# Altium PCB Tigershark 3D R1.8.PcbDoc (part 3 of 3)
Units mil, origin at the board's own origin, x right, y up, seen from the top; angles counter-clockwise.
Board outline 4755 x 4000 mil, 4 copper layers (Top Layer, Groun Plane, Power Plane, Bottom Layer), stack 61.73 mil thick; 343 components, 234 nets, 1061 pads, 540 vias.
Unrouted connection lines stored in the file: 312.
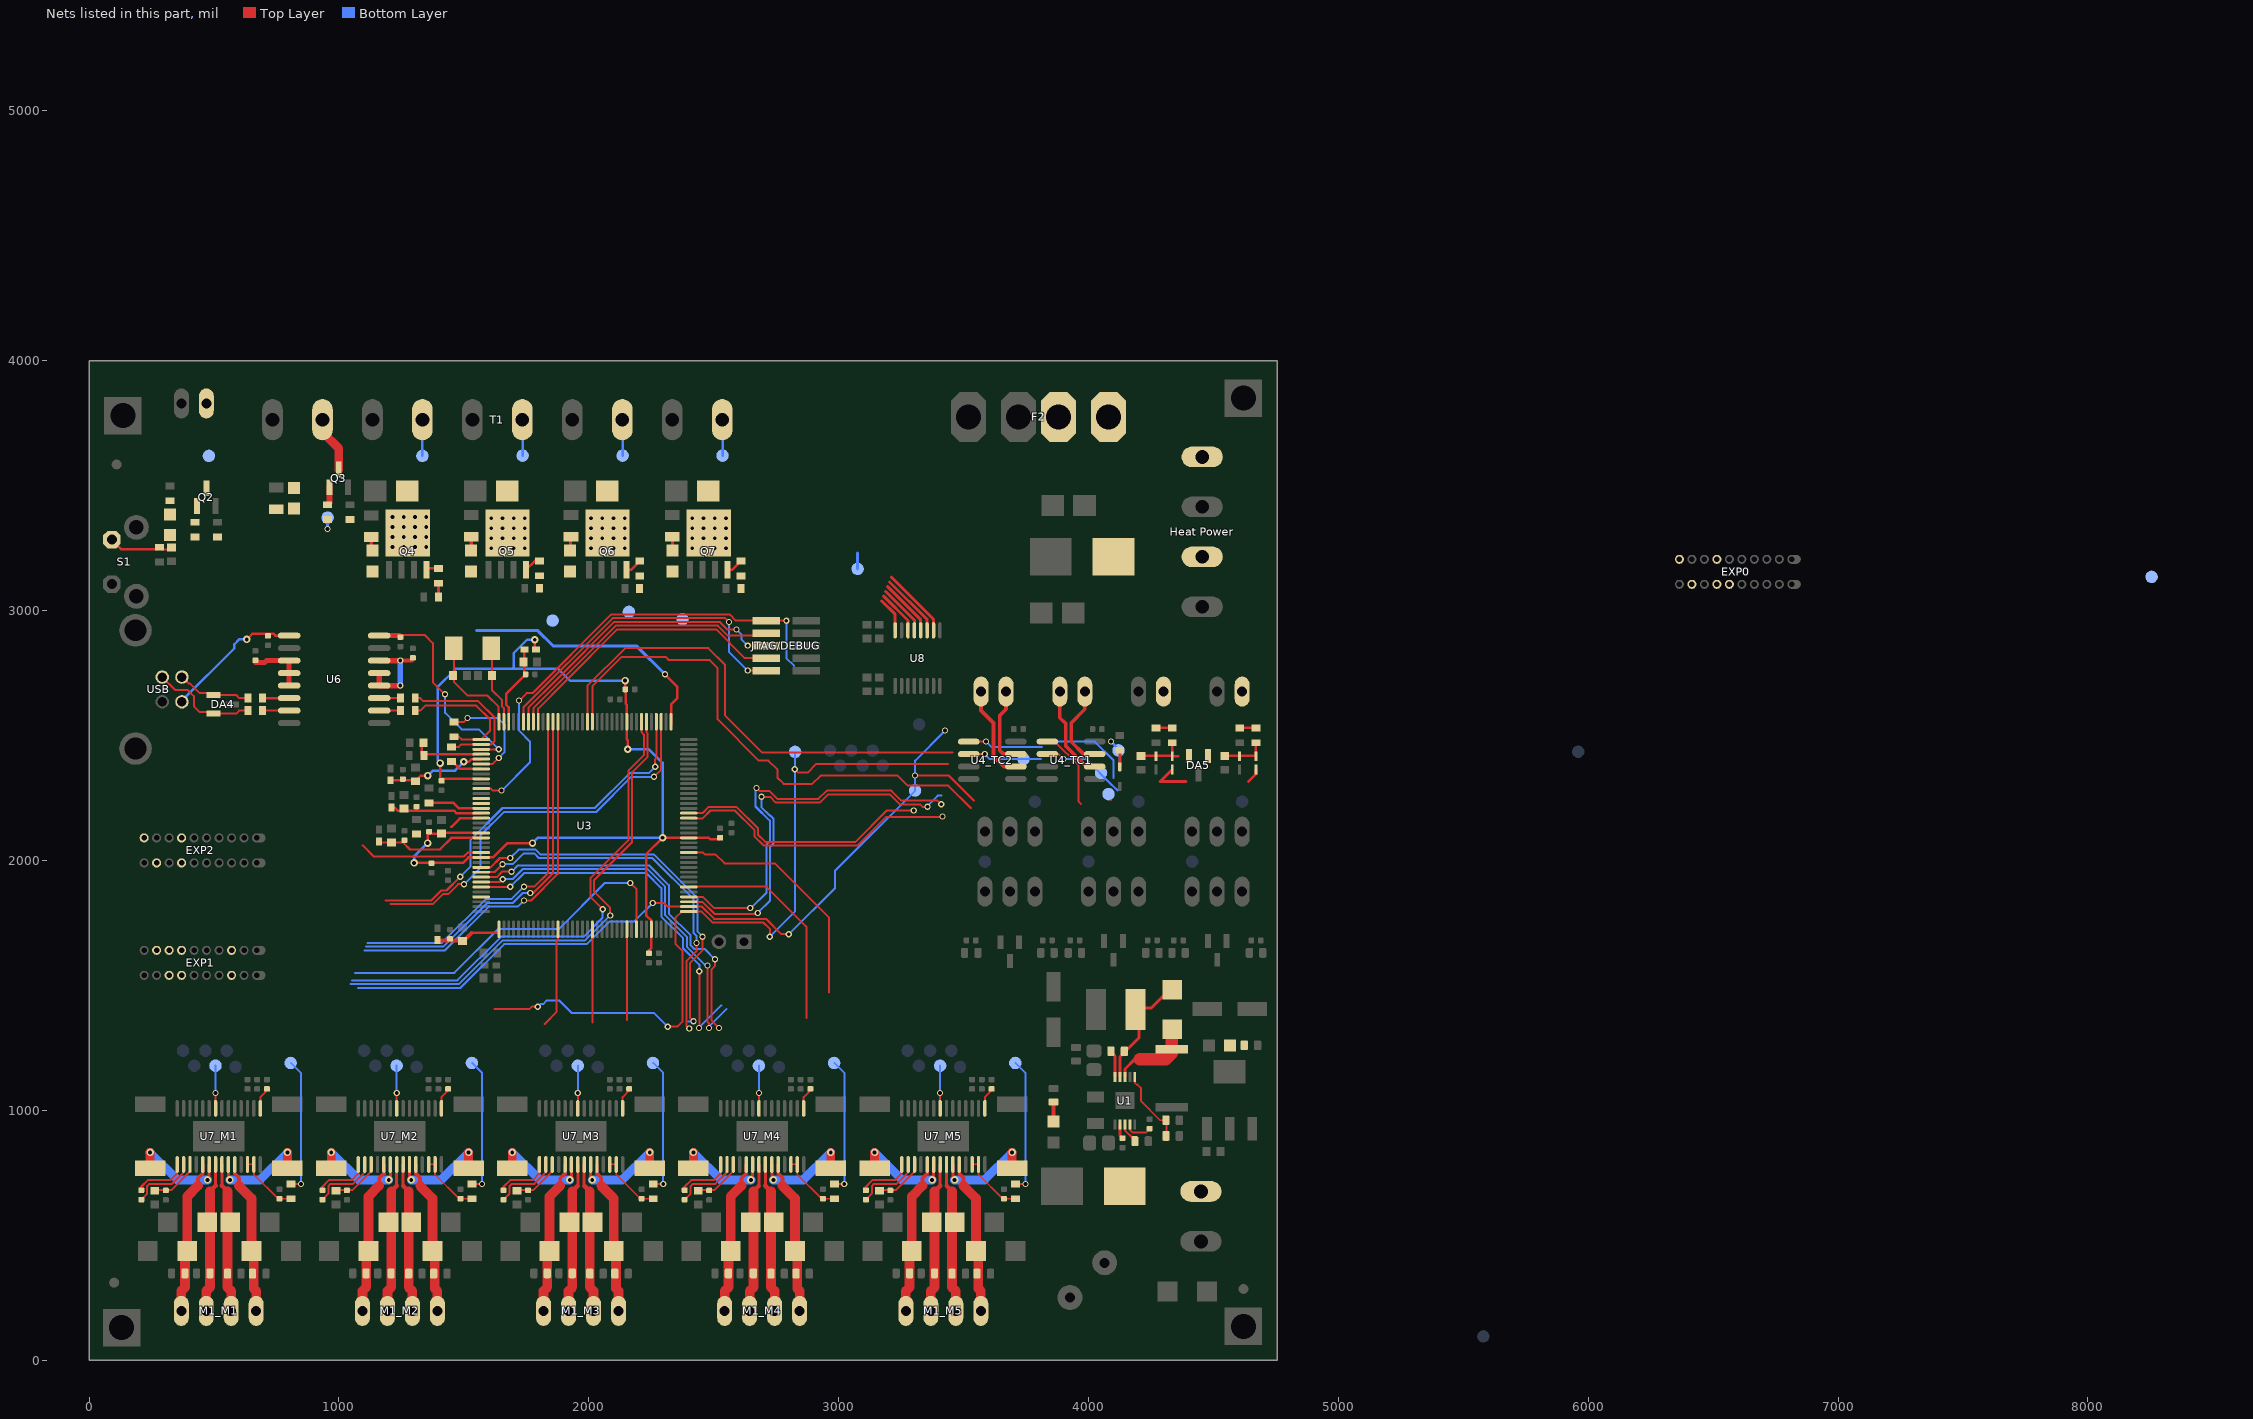
[diagram p5: the nets of this part, all layers, seen from the top]

## Via types
v1: diameter 30, hole 15, Top Layer to Bottom Layer, tented both sides, 229 vias
v2: diameter 25, hole 15, Top Layer to Bottom Layer, tented both sides, 173 vias
v3: diameter 19.68, hole 7.87, Top Layer to Bottom Layer, 75 vias
v4: diameter 25, hole 15, Top Layer to Bottom Layer, 50 vias
v5: diameter 30, hole 15, Top Layer to Bottom Layer, 9 vias
v6: diameter 45, hole 20, Top Layer to Bottom Layer, tented both sides, 4 vias

## Nets (pads, with @x,y where several pads share a name; then routed paths per layer and width w, separated by ;. In a path a pad name is that pad's centre, name@x,y a point inside that pad or via, vN(x,y) a via of type N, cw(c..) or ccw(c..) an arc to the next point about the centre after c; other vN are vias at no path point) (continued)
MODE1_EXP2: EXP1.19 U3.26 | length 1444.3
  Top Layer w8: v2(1740.63,1894.65) 1781.99,1894.65 1836.89,1949.55 U3.26@1836.89,2555
  Bottom Layer w8: 1114.42,1669.65 1411.84,1669.65 1586.84,1844.65 1690.08,1844.65 1724.13,1878.7 1724.13,1879.36 1739.42,1894.65 v2(1740.63,1894.65)
MODE2_EXP1: EXP1.3 U3.6 | length 2046.3
  Top Layer w8: v2(2085.63,1779.65) 2085.63,1810.25 2021.24,1874.65 2021.24,1921.61 2173.38,2073.76 2173.38,2353.16 2235.53,2415.3 2235.53,2509.75 2230.59,2514.68 U3.6@2230.59,2555
  Bottom Layer w8: 1046.07,1504.65 1480.19,1504.65 1655.19,1679.65 1985.63,1679.65 v2(2085.63,1779.65)
MODE2_EXP2: EXP1.18 U3.25 | length 1476.9
  Top Layer w8: v2(1765.63,1869.65) 1778.2,1869.65 1856.57,1948.02 U3.25@1856.57,2555
  Bottom Layer w8: 1108.2,1654.65 1418.06,1654.65 1593.06,1829.65 1696.29,1829.65 1736.29,1869.65 v2(1765.63,1869.65)
MOSI: EXP0.20 EXP2.20 TP8.1 U3.109 | length 3110.5
  Top Layer w8: 1621.7,1404.65 1761.84,1404.65 1771.84,1414.65 v2(1795.63,1414.65) ; v2(2315.63,1334.65) 2353.86,1334.65 2375.63,1356.41 2375.63,1637.07 2345.92,1666.78 2345.92,1769.94 2371.14,1795.16 U3.109@2399.88,1795.16 2451.48,1795.16 2495.49,1751.15 2699.13,1751.15 2724.53,1725.75 v2(2724.53,1694.65) ; v2(2824.53,2364.65) 2838.03,2351.15 2875.36,2351.15 2910.36,2386.15 3437.39,2386.15
  Bottom Layer w8: v2(1795.63,1414.65) 1805.63,1424.65 1816.84,1424.65 1831.84,1439.65 1880.63,1439.65 1930.63,1389.65 2260.63,1389.65 v2(2315.63,1334.65) ; v2(2724.53,1694.65) 2724.53,1694.76 2824.53,1794.76 v2(2824.53,2364.65) 2824.53,2433.54 TP8.1@2825.63,2434.65
NetC3_M1_1: C3_M1.1 D20_M1.A M1_M1.1 U7_M1.5 | length 623.4
  Top Layer w12: 454.76,747.28 U7_M1.5@454.76,784.06
  Top Layer w15: 435.74,698.26 435.74,728.26 454.76,747.28
  Top Layer w39: M1_M1.1@368.74,196.26 368.74,276.26 383.74,291.26 383.74,462.26 392.74,471.26 392.74,655.26 435.74,698.26
NetC3_M2_1: C3_M2.1 D20_M2.A M1_M2.1 U7_M2.5 | length 623.4
  Top Layer w12: 1179.76,747.28 U7_M2.5@1179.76,784.06
  Top Layer w15: 1160.74,698.26 1160.74,728.26 1179.76,747.28
  Top Layer w39: M1_M2.1@1093.74,196.26 1093.74,276.26 1108.74,291.26 1108.74,462.26 1117.74,471.26 1117.74,655.26 1160.74,698.26
NetC3_M3_1: C3_M3.1 D20_M3.A M1_M3.1 U7_M3.5 | length 623.4
  Top Layer w12: 1904.76,747.28 U7_M3.5@1904.76,784.06
  Top Layer w15: 1885.74,698.26 1885.74,728.26 1904.76,747.28
  Top Layer w39: M1_M3.1@1818.74,196.26 1818.74,276.26 1833.74,291.26 1833.74,462.26 1842.74,471.26 1842.74,655.26 1885.74,698.26
NetC3_M4_1: C3_M4.1 D20_M4.A M1_M4.1 U7_M4.5 | length 623.4
  Top Layer w12: 2629.76,747.28 U7_M4.5@2629.76,784.06
  Top Layer w15: 2610.74,698.26 2610.74,728.26 2629.76,747.28
  Top Layer w39: M1_M4.1@2543.74,196.26 2543.74,276.26 2558.74,291.26 2558.74,462.26 2567.74,471.26 2567.74,655.26 2610.74,698.26
NetC3_M5_1: C3_M5.1 D20_M5.A M1_M5.1 U7_M5.5 | length 623.4
  Top Layer w12: 3354.76,747.28 U7_M5.5@3354.76,784.06
  Top Layer w15: 3335.74,698.26 3335.74,728.26 3354.76,747.28
  Top Layer w39: M1_M5.1@3268.74,196.26 3268.74,276.26 3283.74,291.26 3283.74,462.26 3292.74,471.26 3292.74,655.26 3335.74,698.26
NetC5_M1_1: C5_M1.1 D21_M1.A M1_M1.2 U7_M1.7 | length 603.2
  Top Layer w12: 505.94,698.46 U7_M1.7@505.94,784.06
  Top Layer w18: 483.74,676.26 505.94,698.46
  Top Layer w39: M1_M1.2@468.74,196.26 468.74,276.26 483.74,291.26 483.74,676.26
NetC5_M2_1: C5_M2.1 D21_M2.A M1_M2.2 U7_M2.7 | length 603.2
  Top Layer w12: 1230.94,698.46 U7_M2.7@1230.94,784.06
  Top Layer w18: 1208.74,676.26 1230.94,698.46
  Top Layer w39: M1_M2.2@1193.74,196.26 1193.74,276.26 1208.74,291.26 1208.74,676.26
NetC5_M3_1: C5_M3.1 D21_M3.A M1_M3.2 U7_M3.7 | length 603.2
  Top Layer w12: 1955.94,698.46 U7_M3.7@1955.94,784.06
  Top Layer w18: 1933.74,676.26 1955.94,698.46
  Top Layer w39: M1_M3.2@1918.74,196.26 1918.74,276.26 1933.74,291.26 1933.74,676.26
NetC5_M4_1: C5_M4.1 D21_M4.A M1_M4.2 U7_M4.7 | length 603.2
  Top Layer w12: 2680.94,698.46 U7_M4.7@2680.94,784.06
  Top Layer w18: 2658.74,676.26 2680.94,698.46
  Top Layer w39: M1_M4.2@2643.74,196.26 2643.74,276.26 2658.74,291.26 2658.74,676.26
NetC5_M5_1: C5_M5.1 D21_M5.A M1_M5.2 U7_M5.7 | length 603.2
  Top Layer w12: 3405.94,698.46 U7_M5.7@3405.94,784.06
  Top Layer w18: 3383.74,676.26 3405.94,698.46
  Top Layer w39: M1_M5.2@3368.74,196.26 3368.74,276.26 3383.74,291.26 3383.74,676.26
NetC6_M1_1: C6_M1.1 D22_M1.A M1_M1.4 U7_M1.10 | length 623.4
  Top Layer w12: 582.72,747.28 U7_M1.10@582.72,784.06
  Top Layer w15: 582.72,747.28 599.74,730.26 599.74,697.74
  Top Layer w39: 599.74,697.74 649.74,647.74 649.74,471.26 658.74,462.26 658.74,286.26 668.74,276.26 M1_M1.4@668.74,196.26
NetC6_M2_1: C6_M2.1 D22_M2.A M1_M2.4 U7_M2.10 | length 623.4
  Top Layer w12: 1307.72,747.28 U7_M2.10@1307.72,784.06
  Top Layer w15: 1307.72,747.28 1324.74,730.26 1324.74,697.74
  Top Layer w39: 1324.74,697.74 1374.74,647.74 1374.74,471.26 1383.74,462.26 1383.74,286.26 1393.74,276.26 M1_M2.4@1393.74,196.26
NetC6_M3_1: C6_M3.1 D22_M3.A M1_M3.4 U7_M3.10 | length 623.4
  Top Layer w12: 2032.72,747.28 U7_M3.10@2032.72,784.06
  Top Layer w15: 2032.72,747.28 2049.74,730.26 2049.74,697.74
  Top Layer w39: 2049.74,697.74 2099.74,647.74 2099.74,471.26 2108.74,462.26 2108.74,286.26 2118.74,276.26 M1_M3.4@2118.74,196.26
NetC6_M4_1: C6_M4.1 D22_M4.A M1_M4.4 U7_M4.10 | length 623.4
  Top Layer w12: 2757.72,747.28 U7_M4.10@2757.72,784.06
  Top Layer w15: 2757.72,747.28 2774.74,730.26 2774.74,697.74
  Top Layer w39: 2774.74,697.74 2824.74,647.74 2824.74,471.26 2833.74,462.26 2833.74,286.26 2843.74,276.26 M1_M4.4@2843.74,196.26
NetC6_M5_1: C6_M5.1 D22_M5.A M1_M5.4 U7_M5.10 | length 623.4
  Top Layer w12: 3482.72,747.28 U7_M5.10@3482.72,784.06
  Top Layer w15: 3482.72,747.28 3499.74,730.26 3499.74,697.74
  Top Layer w39: 3499.74,697.74 3549.74,647.74 3549.74,471.26 3558.74,462.26 3558.74,286.26 3568.74,276.26 M1_M5.4@3568.74,196.26
NetC8_M1_1: C8_M1.1 D23_M1.A M1_M1.3 U7_M1.8 | length 603.2
  Top Layer w12: 531.54,698.46 U7_M1.8@531.54,784.06
  Top Layer w18: 531.54,698.46 553.74,676.26
  Top Layer w39: 553.74,676.26 553.74,291.26 568.74,276.26 M1_M1.3@568.74,196.26
NetC8_M2_1: C8_M2.1 D23_M2.A M1_M2.3 U7_M2.8 | length 603.2
  Top Layer w12: 1256.54,698.46 U7_M2.8@1256.54,784.06
  Top Layer w18: 1256.54,698.46 1278.74,676.26
  Top Layer w39: 1278.74,676.26 1278.74,291.26 1293.74,276.26 M1_M2.3@1293.74,196.26
NetC8_M3_1: C8_M3.1 D23_M3.A M1_M3.3 U7_M3.8 | length 603.2
  Top Layer w12: 1981.54,698.46 U7_M3.8@1981.54,784.06
  Top Layer w18: 1981.54,698.46 2003.74,676.26
  Top Layer w39: 2003.74,676.26 2003.74,291.26 2018.74,276.26 M1_M3.3@2018.74,196.26
NetC8_M4_1: C8_M4.1 D23_M4.A M1_M4.3 U7_M4.8 | length 603.2
  Top Layer w12: 2706.54,698.46 U7_M4.8@2706.54,784.06
  Top Layer w18: 2706.54,698.46 2728.74,676.26
  Top Layer w39: 2728.74,676.26 2728.74,291.26 2743.74,276.26 M1_M4.3@2743.74,196.26
NetC8_M5_1: C8_M5.1 D23_M5.A M1_M5.3 U7_M5.8 | length 603.2
  Top Layer w12: 3431.54,698.46 U7_M5.8@3431.54,784.06
  Top Layer w18: 3431.54,698.46 3453.74,676.26
  Top Layer w39: 3453.74,676.26 3453.74,291.26 3468.74,276.26 M1_M5.3@3468.74,196.26
NetC22_1: C22.1 U1.4 | length 112
  Top Layer w8: U1.4@4165.26,943.83 4165.26,921.97 4175.71,911.52 4230.22,911.52 C22.1@4245,926.3
NetC40_1: C40.1 U1.10 | length 93.4
  Top Layer w12: C40.1@4100.23,1223.77 4106.2,1217.8 U1.10@4106.2,1132.8
NetC40_2: C40.2 D2.C L1.1 U1.9 | length 475.6
  Top Layer w12: U1.9@4125.89,1132.8 4125.89,1214.12 4153.77,1242 4202.74,1290.97 4202.74,1410 4252.26,1410 D2.C@4335,1492.74
NetC43_2: C43.2 U3.36 X2.1 | length 416.3
  Top Layer w8: X2.1@1459.53,2849.65 1459.53,2714.65 1514.53,2659.65 1594.53,2659.65 1637.63,2616.54 1637.63,2557.41 U3.36@1640.04,2555
NetC44_2: C44.2 U3.35 X2.2 | length 315.6
  Top Layer w8: X2.2@1609.13,2849.65 1612.09,2846.69 C44.2@1612.09,2739.65 1612.09,2682.09 1652.63,2641.54 1652.63,2616.33 1659.72,2609.23 U3.35@1659.72,2555
NetC56_2: C56.2 U6.12 U6.13 U6.14 | length 367.3
  Top Layer w15: v2(1245.63,2799.65) C56.2@1293.19,2799.65
  Top Layer w22: U6.13@1160.75,2749.65 U6.12@1160.75,2699.65 v2(1245.63,2699.65) ; U6.14@1160.75,2799.65 v2(1245.63,2799.65)
  Bottom Layer w22: v2(1245.63,2699.65) v2(1245.63,2799.65)
NetC58_2: C58.2 U6.1 USB.1 | length 552.2
  Top Layer w10: v1(630.63,2884.65) 653.19,2907.2 715.63,2907.2 738.07,2907.2 745.63,2899.65 U6.1@800.51,2899.65
  Bottom Layer w10: USB.1@371.63,2639.65 580.63,2848.65 580.63,2864.65 600.63,2884.65 v1(630.63,2884.65)
NetC59_2: C59.2 U6.3 U6.4 U6.5 | length 238
  Top Layer w20: C59.2@665.63,2792.09 703.07,2792.09 710.63,2799.65 U6.3@800.51,2799.65 U6.4@800.51,2749.65 U6.5@800.51,2699.65
NetC66_M1_2: C66_M1.2 R30_M1.1 U7_M1.3 | length 201.8
  Top Layer w8: C66_M1.2@262.48,677.56 264.92,680 327.78,680 403.58,755.8 U7_M1.3@403.58,784.06
NetC66_M2_2: C66_M2.2 R30_M2.1 U7_M2.3 | length 201.8
  Top Layer w8: C66_M2.2@987.48,677.56 989.92,680 1052.78,680 1128.58,755.8 U7_M2.3@1128.58,784.06
NetC66_M3_2: C66_M3.2 R30_M3.1 U7_M3.3 | length 201.8
  Top Layer w8: C66_M3.2@1712.48,677.56 1714.92,680 1777.78,680 1853.58,755.8 U7_M3.3@1853.58,784.06
NetC66_M4_2: C66_M4.2 R30_M4.1 U7_M4.3 | length 201.8
  Top Layer w8: C66_M4.2@2437.48,677.56 2439.92,680 2502.78,680 2578.58,755.8 U7_M4.3@2578.58,784.06
NetC66_M5_2: C66_M5.2 R30_M5.1 U7_M5.3 | length 201.8
  Top Layer w8: C66_M5.2@3162.48,677.56 3164.92,680 3227.78,680 3303.58,755.8 U7_M5.3@3303.58,784.06
NetC68_M1_1: C68_M1.1 U7_M1.1 | length 218.5
  Top Layer w8: C68_M1.1@207.48,678.7 207.48,692.79 234.69,720 325.36,720 352.4,747.05 U7_M1.1@352.4,784.06
NetC68_M1_2: C68_M1.2 U7_M1.2 | length 266.8
  Top Layer w8: C68_M1.2@207.48,641 232.48,666 232.48,696.58 240.9,705 331.57,705 377.99,751.42 U7_M1.2@377.99,784.06
NetC68_M2_1: C68_M2.1 U7_M2.1 | length 218.5
  Top Layer w8: C68_M2.1@932.48,678.7 932.48,692.79 959.69,720 1050.36,720 1077.4,747.05 U7_M2.1@1077.4,784.06
NetC68_M2_2: C68_M2.2 U7_M2.2 | length 266.8
  Top Layer w8: C68_M2.2@932.48,641 957.48,666 957.48,696.58 965.9,705 1056.57,705 1102.99,751.42 U7_M2.2@1102.99,784.06
NetC68_M3_1: C68_M3.1 U7_M3.1 | length 218.5
  Top Layer w8: C68_M3.1@1657.48,678.7 1657.48,692.79 1684.69,720 1775.36,720 1802.4,747.05 U7_M3.1@1802.4,784.06
NetC68_M3_2: C68_M3.2 U7_M3.2 | length 266.8
  Top Layer w8: C68_M3.2@1657.48,641 1682.48,666 1682.48,696.58 1690.9,705 1781.57,705 1827.99,751.42 U7_M3.2@1827.99,784.06
NetC68_M4_1: C68_M4.1 U7_M4.1 | length 218.5
  Top Layer w8: C68_M4.1@2382.48,678.7 2382.48,692.79 2409.69,720 2500.36,720 2527.4,747.05 U7_M4.1@2527.4,784.06
NetC68_M4_2: C68_M4.2 U7_M4.2 | length 266.8
  Top Layer w8: C68_M4.2@2382.48,641 2407.48,666 2407.48,696.58 2415.9,705 2506.57,705 2552.99,751.42 U7_M4.2@2552.99,784.06
NetC68_M5_1: C68_M5.1 U7_M5.1 | length 218.5
  Top Layer w8: C68_M5.1@3107.48,678.7 3107.48,692.79 3134.69,720 3225.36,720 3252.4,747.05 U7_M5.1@3252.4,784.06
NetC68_M5_2: C68_M5.2 U7_M5.2 | length 266.8
  Top Layer w8: C68_M5.2@3107.48,641 3132.48,666 3132.48,696.58 3140.9,705 3231.57,705 3277.99,751.42 U7_M5.2@3277.99,784.06
NetC71_M1_2: C71_M1.2 U7_M1.15 | length 88.9
  Top Layer w8: U7_M1.15@685.08,1008.46 685.08,1052.6 712.48,1080 C71_M1.2@712.48,1086
NetC71_M2_2: C71_M2.2 U7_M2.15 | length 88.9
  Top Layer w8: U7_M2.15@1410.08,1008.46 1410.08,1052.6 1437.48,1080 C71_M2.2@1437.48,1086
NetC71_M3_2: C71_M3.2 U7_M3.15 | length 88.9
  Top Layer w8: U7_M3.15@2135.08,1008.46 2135.08,1052.6 2162.48,1080 C71_M3.2@2162.48,1086
NetC71_M4_2: C71_M4.2 U7_M4.15 | length 88.9
  Top Layer w8: U7_M4.15@2860.08,1008.46 2860.08,1052.6 2887.48,1080 C71_M4.2@2887.48,1086
NetC71_M5_2: C71_M5.2 U7_M5.15 | length 88.9
  Top Layer w8: U7_M5.15@3585.08,1008.46 3585.08,1052.6 3612.48,1080 C71_M5.2@3612.48,1086
NetC73_2: C73.2 R23.2 U3.40 | length 282.9
  Top Layer w10: C73.2@1332.09,2470.87 1332.09,2425.08 U3.40@1569.17,2425.08
NetC75_M1_2: C75_M1.2 R31_M1.1 U7_M1.12 U7_M1.13 | length 255
  Top Layer w7: U7_M1.12@633.9,784.06 659.49,784.06 659.49,742.99 757.01,645.47 R31_M1.1@807.48,645.47
NetC75_M2_2: C75_M2.2 R31_M2.1 U7_M2.12 U7_M2.13 | length 255
  Top Layer w7: U7_M2.12@1358.9,784.06 1384.49,784.06 1384.49,742.99 1482.01,645.47 R31_M2.1@1532.48,645.47
NetC75_M3_2: C75_M3.2 R31_M3.1 U7_M3.12 U7_M3.13 | length 255
  Top Layer w7: U7_M3.12@2083.9,784.06 2109.49,784.06 2109.49,742.99 2207.01,645.47 R31_M3.1@2257.48,645.47
NetC75_M4_2: C75_M4.2 R31_M4.1 U7_M4.12 U7_M4.13 | length 255
  Top Layer w7: U7_M4.12@2808.9,784.06 2834.49,784.06 2834.49,742.99 2932.01,645.47 R31_M4.1@2982.48,645.47
NetC75_M5_2: C75_M5.2 R31_M5.1 U7_M5.12 U7_M5.13 | length 255
  Top Layer w7: U7_M5.12@3533.9,784.06 3559.49,784.06 3559.49,742.99 3657.01,645.47 R31_M5.1@3707.48,645.47
NetD2_A: D2.A R9.2 U1.8 | length 326.9
  Top Layer w12: U1.8@4145.57,1132.8 4145.57,1164.67 4184.78,1203.88 4204,1203.88
  Top Layer w50: 4204,1203.88 4308.74,1203.88 R9.2@4334,1229.14 ; R9.2@4334,1244.14 D2.A@4334,1324
NetD7_A: D7.A R8.1 | length 60
  Top Layer w15: D7.A@3860,956.72 3860,1016.69
NetD9_A: D9.A R11.1
NetD10_A: D10.A R13.2
NetD10_C: D10.C FAN-1.2 Q2.3
NetD11_A: D11.A R47.2
NetD11_C: D11.C Q3.3 T1.2 | length 226.5
  Top Layer w35: T1.2@934,3764 934,3714 999,3649 Q3.3@999,3564.43
NetD12_1: D12.1 D13.C Q4.5 T1.4 TP11.1 | length 142.7
  Bottom Layer w10: TP11.1@1334,3619 T1.4@1334,3760.32
  Bottom Layer w40: T1.4@1334,3760.32 T1.4@1335,3761.32
  other v1: 1214,3254 1259,3254 1304,3254 1349,3254 1214,3294 1259,3294 1304,3294 1349,3294 1214,3334 1259,3334 1304,3334 1349,3334 1214,3374 1259,3374 1304,3374 1349,3374
NetD13_A: D13.A R56.1 | length 52
  Top Layer w15: D13.A@1129,3242.36 R56.1@1129,3294.33
NetD14_A: D14.A R60.1 | length 52
  Top Layer w15: D14.A@1529,3243.72 R60.1@1529,3295.69
NetD14_C: D14.C D15.1 Q5.5 T1.6 TP12.1 | length 141.3
  Bottom Layer w10: TP12.1@1735,3620 T1.6@1735,3761.32
  other v1: 1609,3249 1654,3249 1699,3249 1744,3249 1609,3289 1654,3289 1699,3289 1744,3289 1609,3329 1654,3329 1699,3329 1744,3329 1609,3369 1654,3369 1699,3369 1744,3369
NetD16_A: D16.A R64.1 | length 52
  Top Layer w12: D16.A@1927.5,3242.23 R64.1@1927.5,3294.2
NetD16_C: D16.C D17.1 Q6.5 T1.8 TP13.1 | length 141.3
  Bottom Layer w10: TP13.1@2135,3620 T1.8@2135,3761.32
  other v1: 2009,3249 2054,3249 2099,3249 2144,3249 2009,3289 2054,3289 2099,3289 2144,3289 2009,3329 2054,3329 2099,3329 2144,3329 2009,3369 2054,3369 2099,3369 2144,3369
NetD18_A: D18.A R68.1 | length 52
  Top Layer w12: D18.A@2334,3243.72 R68.1@2334,3295.69
NetD18_C: D18.C D19.1 Q7.5 T1.10 TP14.1 | length 141.3
  Bottom Layer w10: TP14.1@2535,3620 T1.10@2535,3761.32
  other v1: 2414,3249 2459,3249 2504,3249 2549,3249 2414,3289 2459,3289 2504,3289 2549,3289 2414,3329 2459,3329 2504,3329 2549,3329 2414,3369 2459,3369 2504,3369 2549,3369
NetF1_1: "Heat Power.3" F1.1
NetF2_1: "Heat Power.1" F2.1
NetF3_1: "Motor Power.1" F3.1
NetP2_TR1_1: P2_TR1.1 R14_TR1.2 R19_TR1.1 | length 65
  Top Layer w10: R19_TR1.1@4605,2530 R14_TR1.2@4670,2530
NetP2_TR2_1: P2_TR2.1 R14_TR2.2 R19_TR2.1 | length 65
  Top Layer w10: R19_TR2.1@4270,2530 R14_TR2.2@4335,2530
NetQ2_1: Q2.1 R45.2
NetQ3_1: Q3.1 R52.2 | length 73.2
  Top Layer w25: R52.2@954,3423.53 961.6,3431.13 Q3.1@961.6,3493.57
NetQ4_4: Q4.4 R58.2 | length 50.5
  Top Layer w10: Q4.4@1350.5,3163.66 1355.36,3168.53 R58.2@1399,3168.53
NetQ5_4: Q5.4 R62.2 | length 68.6
  Top Layer w10: Q5.4@1749,3163.28 1784.25,3198.53 R62.2@1803,3198.53
NetQ6_4: Q6.4 R66.2 | length 68.6
  Top Layer w10: Q6.4@2150,3162.85 2168.75,3162.85 R66.2@2204,3198.1
NetQ7_4: Q7.4 R70.2 | length 68.6
  Top Layer w10: Q7.4@2555,3162.85 2573.75,3162.85 R70.2@2609,3198.1
NetR4_1: R4.1 U3.51 | length 223.6
  Top Layer w10: R4.1@1354.53,2230.12 1459.05,2230.12 1480.63,2208.54 U3.51@1569.17,2208.54
NetR5_2: R5.2 U3.42 | length 434.8
  Top Layer w8: R5.2@1469.53,2553.7 1498.58,2553.7 v2(1514.53,2569.65) ; U3.42@1569.17,2385.71 1613.82,2385.71 v2@1639.53,2411.42
  Bottom Layer w8: v2(1514.53,2569.65) 1635.63,2569.65 1663.03,2542.25 1663.03,2434.91 1662.03,2433.91 1662.03,2432.15 v2(1639.53,2409.65)
NetR6_2: R6.2 U3.53 | length 135
  Top Layer w10: R6.2@1304.53,2105.12 R6.2@1304.53,2106.11 ; 1449.82,2133.83 1483.97,2167.99 1567.99,2167.99 U3.53@1569.17,2169.17
NetR7_1: R7.1 U1.3 | length 76.4
  Top Layer w8: U1.3@4145.57,943.83 4145.57,920.43 4177.86,888.14 R7.1@4177.86,880.84
NetR10_2: R10.2 R12.1 U1.6 | length 291.8
  Top Layer w7: U1.6@4184.94,1132.8 4184.94,1110.06 4191.82,1103.18 4195.51,1103.18 4210.44,1088.25 4210.44,1035.56 4286,960 R10.2@4304.85,960 ; R12.1@4312.4,896.36 R10.2@4312.4,952.45
NetR17_1: R17.1 U1.2 | length 56.9
  Top Layer w12: U1.2@4125.89,943.83 4125.89,899.73 R17.1@4134.95,890.68
NetR22_2: R22.2 U3.43 | length 129.5
  Top Layer w10: R22.2@1452.58,2397.07 1483.62,2366.02 U3.43@1569.17,2366.02
NetR32_M1_2: R32_M1.2 U7_M1.9 | length 404.1
  Top Layer w12: U7_M1.9@557.13,784.06 557.13,727.87 v1(563.74,721.26)
  Top Layer w35: R32_M1.2@793.74,768.31 v1(793.74,831.26)
  Bottom Layer w35: v1(563.74,721.26) 683.74,721.26 v1(793.74,831.26)
NetR32_M2_2: R32_M2.2 U7_M2.9 | length 404.1
  Top Layer w12: U7_M2.9@1282.13,784.06 1282.13,727.87 v1(1288.74,721.26)
  Top Layer w35: R32_M2.2@1518.74,768.31 v1(1518.74,831.26)
  Bottom Layer w35: v1(1288.74,721.26) 1408.74,721.26 v1(1518.74,831.26)
NetR32_M3_2: R32_M3.2 U7_M3.9 | length 404.1
  Top Layer w12: U7_M3.9@2007.13,784.06 2007.13,727.87 v1(2013.74,721.26)
  Top Layer w35: R32_M3.2@2243.74,768.31 v1(2243.74,831.26)
  Bottom Layer w35: v1(2013.74,721.26) 2133.74,721.26 v1(2243.74,831.26)
NetR32_M4_2: R32_M4.2 U7_M4.9 | length 404.1
  Top Layer w12: U7_M4.9@2732.13,784.06 2732.13,727.87 v1(2738.74,721.26)
  Top Layer w35: R32_M4.2@2968.74,768.31 v1(2968.74,831.26)
  Bottom Layer w35: v1(2738.74,721.26) 2858.74,721.26 v1(2968.74,831.26)
NetR32_M5_2: R32_M5.2 U7_M5.9 | length 404.1
  Top Layer w12: U7_M5.9@3457.13,784.06 3457.13,727.87 v1(3463.74,721.26)
  Top Layer w35: R32_M5.2@3693.74,768.31 v1(3693.74,831.26)
  Bottom Layer w35: v1(3463.74,721.26) 3583.74,721.26 v1(3693.74,831.26)
NetR33_M1_2: R33_M1.2 U7_M1.6 | length 404.1
  Top Layer w12: v1(473.74,721.26) 480.35,727.87 U7_M1.6@480.35,784.06
  Top Layer w35: R33_M1.2@243.74,768.31 v1(243.74,831.26)
  Bottom Layer w35: v1(243.74,831.26) 353.74,721.26 v1(473.74,721.26)
NetR33_M2_2: R33_M2.2 U7_M2.6 | length 404.1
  Top Layer w12: v1(1198.74,721.26) 1205.35,727.87 U7_M2.6@1205.35,784.06
  Top Layer w35: R33_M2.2@968.74,768.31 v1(968.74,831.26)
  Bottom Layer w35: v1(968.74,831.26) 1078.74,721.26 v1(1198.74,721.26)
NetR33_M3_2: R33_M3.2 U7_M3.6 | length 404.1
  Top Layer w12: v1(1923.74,721.26) 1930.35,727.87 U7_M3.6@1930.35,784.06
  Top Layer w35: R33_M3.2@1693.74,768.31 v1(1693.74,831.26)
  Bottom Layer w35: v1(1693.74,831.26) 1803.74,721.26 v1(1923.74,721.26)
NetR33_M4_2: R33_M4.2 U7_M4.6 | length 404.1
  Top Layer w12: v1(2648.74,721.26) 2655.35,727.87 U7_M4.6@2655.35,784.06
  Top Layer w35: R33_M4.2@2418.74,768.31 v1(2418.74,831.26)
  Bottom Layer w35: v1(2418.74,831.26) 2528.74,721.26 v1(2648.74,721.26)
NetR33_M5_2: R33_M5.2 U7_M5.6 | length 404.1
  Top Layer w12: v1(3373.74,721.26) 3380.35,727.87 U7_M5.6@3380.35,784.06
  Top Layer w35: R33_M5.2@3143.74,768.31 v1(3143.74,831.26)
  Bottom Layer w35: v1(3143.74,831.26) 3253.74,721.26 v1(3373.74,721.26)
NetR45_1: R45.1 R46.1 TP41.1 U8.16 | length 140.1
  Top Layer w12: 3172.28,3038.65 3226.06,2984.86 U8.16@3226.06,2920.87
NetR52_1: R52.1 R55.1 TP42.1 U8.14 | length 222.7
  Top Layer w12: 3180.15,3057.65 3277.24,2960.55 U8.14@3277.24,2920.87
  Bottom Layer w12: v2(954,3326.42) 954.47,3326.9 TP42.1@954.47,3371.9
NetR58_1: R58.1 R59.1 TP48.1 U8.13 | length 258.8
  Top Layer w12: R59.1@1399,3054 R58.1@1399,3109.47 ; 3188.02,3076.65 3302.83,2961.83 U8.13@3302.83,2920.87
NetR62_1: R62.1 R63.1 TP49.1 U8.12 | length 229.7
  Top Layer w12: 3195.89,3095.65 3328.43,2963.11 U8.12@3328.43,2920.87
NetR66_1: R66.1 R67.1 TP50.1 U8.11 | length 256
  Top Layer w12: 3203.76,3114.65 3354.02,2964.39 U8.11@3354.02,2920.87
NetR70_1: R70.1 R71.1 TP51.1 U8.10 | length 346.8
  Top Layer w12: 3210.63,3134.65 3379.61,2965.67 U8.10@3379.61,2920.87
  Bottom Layer w12: TP51.1@3075.63,3166.65 3075.63,3229.65
NetT2_TC1_1: T2_TC1.1 U4_TC1.3 | length 337.6
  Top Layer w15: T2_TC1.1@3985,2675.47 3985,2604.96 3930.51,2550.47 3930.51,2474.96 3980,2425.47 U4_TC1.3@4024.49,2425.47
NetT2_TC1_2: T2_TC1.2 U4_TC1.2 | length 377.3
  Top Layer w15: T2_TC1.2@3885,2675.47 3885,2570.98 3908.51,2547.47 3908.51,2458.12 3991.16,2375.47 U4_TC1.2@4024.49,2375.47
NetT2_TC2_1: T2_TC2.1 U4_TC2.3 | length 316.1
  Top Layer w15: T2_TC2.1@3670,2675.47 3670,2604.96 3645,2579.96 3645,2440.47 3660,2425.47 U4_TC2.3@3709.49,2425.47
NetT2_TC2_2: T2_TC2.2 U4_TC2.2 | length 386.5
  Top Layer w15: T2_TC2.2@3570,2675.47 3570,2600.47 3620,2550.47 3620,2415.98 3660.51,2375.47 U4_TC2.2@3709.49,2375.47
NRST: U3.69
OVREF: D1.2 D3_TR1.2 D3_TR2.2 R1.1 TP2.1 | length 292.8
  Top Layer w12: D1.2@4125,2375.47 R1.1@4125,2435.47 ; D3_TR2.2@4335,2363.9 4286.57,2315.47 4390,2315.47 ; 4640,2315.47 4670,2345.47 D3_TR1.2@4670,2363.9
R_N: DA4.1 R18.2 USB.2 | length 298.5
  Top Layer w8: USB.2@371.63,2733.86 398.34,2707.15 404.49,2707.15 442.09,2669.55 490.73,2669.55 DA4.1@498.23,2662.05 589.14,2662.05 601.54,2649.65 R18.2@635.22,2649.65
R_P: DA4.2 R20.2 USB.3 | length 432.3
  Top Layer w8: USB.3@292.63,2733.86 344.34,2682.15 394.14,2682.15 419.13,2657.15 419.13,2616.37 440.75,2594.74 490.73,2594.74 DA4.2@498.23,2587.24 588.23,2587.24 600.63,2599.65 R20.2@635.22,2599.65
REF1: R31_M1.2 TP33_M1.1 U3.63 | length 2070.9
  Top Layer w8: R31_M1.2@807.48,704.53 847.01,704.53 v4(847.48,705) ; U3.63@1569.17,1972.32 1607.2,1972.32 1644.53,2009.65 v2@1689.53,2009.65 ; v2(2418.63,1355.8) 2405.63,1368.8 2405.63,1589.65 2454.53,1638.54 v2(2454.53,1694.65)
  Bottom Layer w8: TP33_M1.1@807.48,1190 847.48,1150 v4(847.48,705) ; v2(1685.63,2009.65) 1719.13,2043.15 1787.13,2043.15 1805.63,2024.65 2260.63,2024.65 2434.53,1850.75 2434.53,1715.6 2435.48,1714.65 2435.74,1714.65 2454.53,1695.86 v2(2454.53,1694.65) ; 2396.78,1355.8 v2(2418.63,1355.8)
REF2: R31_M2.2 TP33_M2.1 U3.64 | length 2043.4
  Top Layer w8: R31_M2.2@1532.48,704.53 1572.01,704.53 v4(1572.48,705) ; U3.64@1569.17,1952.64 1622.52,1952.64 v2(1654.53,1984.65) ; v2(2402.03,1327.15) 2390.63,1338.54 2390.63,1595.86 2430.63,1635.86 v2(2430.63,1669.65)
  Bottom Layer w8: TP33_M2.1@1532.48,1190 1572.48,1150 v4(1572.48,705) ; v2(1654.53,1984.65) 1695.63,1984.65 1739.13,2028.15 1780.92,2028.15 1799.42,2009.65 2254.42,2009.65 2419.53,1844.53 2419.53,1709.39 2422.13,1706.79 2422.13,1705.83 2428.31,1699.65 2429.53,1699.65 2430.63,1698.54 v2(2430.63,1669.65)
REF3: R31_M3.2 TP33_M3.1 U3.65 | length 2034.4
  Top Layer w8: U3.65@1569.17,1932.95 1630.7,1932.95 1652.4,1954.65 v2@1689.53,1954.65 ; R31_M3.2@2257.48,704.53 2297.01,704.53 v4(2297.48,705) ; v2(2504.53,1604.65) 2504.53,1576.41 2490.63,1562.51 2490.63,1359.65 v2(2520.63,1329.65)
  Bottom Layer w8: v2(1690.63,1954.65) 1715.63,1979.65 2241.99,1979.65 2320.63,1901.01 2320.63,1787.07 2407.13,1700.57 2407.13,1659.91 2420.9,1646.15 2463.03,1646.15 v2(2504.53,1604.65) ; TP33_M3.1@2257.48,1190 2297.48,1150 v4(2297.48,705)
REF4: R31_M4.2 TP33_M4.1 U3.66 | length 2073.9
  Top Layer w8: U3.66@1569.17,1913.27 1643.15,1913.27 v2@1654.53,1924.65 ; v2(2474.53,1579.65) 2474.53,1354.53 2480.63,1348.43 v2(2480.63,1329.65) ; R31_M4.2@2982.48,704.53 3022.01,704.53 v4(3022.48,705)
  Bottom Layer w8: v2(1655.63,1924.65) 1694.42,1924.65 1734.42,1964.65 2235.78,1964.65 2305.63,1894.79 2305.63,1780.86 2392.13,1694.36 2392.13,1653.7 2466.18,1579.65 v2(2474.53,1579.65) ; v2(2480.63,1329.65) 2480.63,1334.65 2550.63,1404.65 ; TP33_M4.1@2982.48,1190 3022.48,1150 v4(3022.48,705)
REF5: R31_M5.2 TP33_M5.1 U3.67 | length 2075.7
  Top Layer w8: U3.67@1569.17,1893.58 v2@1688.46,1893.58 ; v2(2440.63,1329.65) 2442.13,1331.15 v2(2442.13,1556.15) 2445.63,1559.65 v2@2450.63,1554.65 ; R31_M5.2@3707.48,704.53 3747.01,704.53 v4(3747.48,705)
  Bottom Layer w8: v2(1685.63,1894.65) 1740.63,1949.65 2229.56,1949.65 2290.63,1888.58 2290.63,1774.65 2377.13,1688.15 2377.13,1647.49 2442.13,1582.49 v2(2442.13,1556.15) ; v2(2440.63,1329.65) 2530.63,1419.65 ; TP33_M5.1@3707.48,1190 3747.48,1150 v4(3747.48,705)
REF_EXP1: EXP1.8 U3.101 | length 1446
  Top Layer w8: v2(2165.63,1909.65) 2191.22,1884.06 U3.101@2191.22,1724.29
  Bottom Layer w8: 1064.71,1549.65 1461.55,1549.65 1636.55,1724.65 1878.86,1724.65 2063.86,1909.65 v2(2165.63,1909.65)
REF_EXP2: EXP1.13 U3.60 | length 499.7
  Top Layer w8: 1094.63,2060.65 1139.63,2015.65 1499,2015.65 1514.73,2031.38 U3.60@1569.17,2031.38
RESET: C63.2 EXP0.5 JTAG/DEBUG.10 R21.1 S1.1 U3.47 | length 2203.1
  Top Layer w8: R21.1@272.47,3245 R21.1@281,3253.53 289.53,3245 322.44,3245 C63.2@330,3252.56 C63.2@337.56,3245 ; U3.47@1569.17,2287.28 1607.99,2287.28 1615.63,2279.65 v2(1650.63,2279.65) ; v2(1720.63,2639.65) 1750.63,2669.65 1774.42,2669.65 2089.42,2984.65 2563.86,2984.65 2588.86,2959.65 JTAG/DEBUG.10@2710.71,2959.65 v2(2790.63,2959.65)
  Top Layer w10: S1.1@91,3284 130,3245 R21.1@272.47,3245
  Bottom Layer w8: v2(1650.63,2279.65) 1764.53,2393.54 1764.53,2475.75 1720.63,2519.65 v2(1720.63,2639.65) ; v2(2790.63,2959.65) 2790.63,2809.65 2821.63,2778.65
RXD0: EXP2.17 U3.3 | length 1574.6
  Top Layer w8: 1205.78,1824.65 1375.78,1824.65 1415.78,1864.65 1436.52,1864.65 1476.52,1904.65 v2(1500.63,1904.65) ; v2(2260.63,2334.65) 2289.65,2363.66 U3.3@2289.65,2555
  Bottom Layer w8: v2(1500.63,1904.65) 1565.63,1969.65 1565.63,2099.65 1660.63,2194.65 2030.63,2194.65 2170.63,2334.65 v2(2260.63,2334.65)
RXD1: EXP0.17 U3.18 | length 1960.2
  Top Layer w8: U3.18@1994.37,2555 1994.37,2698.68 2145.34,2849.65 2478.06,2849.65 2545.63,2782.07 2545.63,2579.79 2694.28,2431.15 3456.26,2431.15 ; 4090.06,2242.66 4090.29,2242.66
SCLK: EXP0.2 EXP2.2 TP6.1 U3.110 U4_TC1.5 U4_TC2.5 | length 3864.4
  Top Layer w8: v2(2255.63,1829.65) 2300.63,1829.65 2315.43,1814.84 U3.110@2399.88,1814.84 2453.01,1814.84 2501.7,1766.15 2709.13,1766.15 2770.63,1704.65 v2(2800.63,1704.65) ; v2(3305.63,2339.65) 3441.47,2339.65 3541.47,2239.65 ; U4_TC2.5@3520.51,2475.47 v2(3590,2475.47) ; U4_TC1.5@3865,2475.47 3960,2380.47 3960,2235.47 3970,2225.47
  Bottom Layer w8: 1075.63,1489.65 1486.4,1489.65 1661.4,1664.65 1991.84,1664.65 2083.34,1756.15 2182.13,1756.15 v2(2255.63,1829.65) ; v2(2800.63,1704.65) 2985.63,1889.65 2985.63,1959.65 TP6.1@3305.63,2279.65 v2(3305.63,2339.65) 3305.63,2399.65 v2(3425.63,2519.65) ; v2(3590,2475.47) 3611,2454.47 3814,2454.47
SHDN: U3.50
SPD: U3.1 | length 1057.5
  Top Layer w10: v2(2304.53,2744.65) 2354.53,2694.65 2354.53,2649.65 2329.53,2624.65 U3.1@2329.53,2544.65
  Bottom Layer w12: 1550.63,2919.65 1795.63,2919.65 1856.13,2859.15 2190.03,2859.15 v2(2304.53,2744.65)
STEP1: TP40_M1.1 U3.85 U7_M1.22 | length 571.8
  Top Layer w8: U7_M1.22@505.94,1008.46 v4(505.94,1068.9) ; 1822.5,1344.65 1871.57,1393.72 1871.57,1678.02 1876.26,1682.7 U3.85@1876.26,1724.29
  Bottom Layer w8: TP40_M1.1@505.74,1178.26 505.74,1069.1 v4(505.94,1068.9)
STEP2: TP40_M2.1 U3.92 U7_M2.22 | length 543.7
  Top Layer w8: U7_M2.22@1230.94,1008.46 v4(1230.94,1068.9) ; 2014.06,1350.5 U3.92@2014.06,1724.29
  Bottom Layer w8: TP40_M2.1@1230.74,1178.26 1230.74,1069.1 v4(1230.94,1068.9)
STEP3: TP40_M3.1 U3.99 U7_M3.22 | length 533.2
  Top Layer w8: U7_M3.22@1955.94,1008.46 v4(1955.94,1068.9) ; 2151.85,1361 U3.99@2151.85,1724.29
  Bottom Layer w8: TP40_M3.1@1955.74,1178.26 1955.74,1069.1 v4(1955.94,1068.9)
STEP4: TP40_M4.1 U3.114 U7_M4.22 | length 1073.9
  Top Layer w8: U3.114@2399.88,1893.58 2400.94,1894.65 2710.92,1894.65 2870.63,1734.94 2870.63,1368.29 ; U7_M4.22@2680.94,1008.46 v4(2680.94,1068.9)
  Bottom Layer w8: TP40_M4.1@2680.74,1178.26 2680.74,1069.1 v4(2680.94,1068.9)
STEP5: TP40_M5.1 U3.121 U7_M5.22 | length 1139.6
  Top Layer w8: U3.121@2399.88,2031.38 2457.68,2031.38 2464.42,2024.65 2506.84,2024.65 2543.22,1988.27 2744.58,1988.27 2960.63,1772.22 2960.63,1470.56 ; U7_M5.22@3405.94,1008.46 v4(3405.94,1068.9)
  Bottom Layer w8: TP40_M5.1@3405.74,1178.26 3405.74,1069.1 v4(3405.94,1068.9)
STEP_EXP1: EXP1.4 U3.7 | length 2004.4
  Top Layer w8: v2(2055.63,1804.65) 2006.24,1854.04 2006.24,1927.83 2158.38,2079.97 2158.38,2359.37 2220.53,2421.51 2220.53,2503.53 2210.91,2513.16 U3.7@2210.91,2555
  Bottom Layer w8: 1052.28,1519.65 1473.98,1519.65 1648.98,1694.65 1978.86,1694.65 2055.63,1771.41 v2(2055.63,1804.65)
STEP_EXP2: EXP1.17 U3.24 | length 1509.9
  Top Layer w8: v2(1740.63,1839.65) 1769.42,1839.65 1876.26,1946.49 U3.24@1876.26,2555
  Bottom Layer w8: 1101.99,1639.65 1424.27,1639.65 1599.27,1814.65 1715.63,1814.65 v2(1740.63,1839.65)
TC_CS1: TP4.1 U3.111 U4_TC1.6 | length 1935.8
  Top Layer w8: U3.111@2399.88,1834.53 2454.53,1834.53 2502.92,1786.15 2672.13,1786.15 v2(2675.63,1789.65) ; v2(2690.63,2254.65) 2725.23,2254.65 2748.73,2231.15 2925.07,2231.15 2958.57,2264.65 3204.56,2264.65 3246.06,2223.15 3280.9,2223.15 3327.13,2223.15 3335.63,2214.65 v2(3355.63,2214.65) ; U4_TC1.6@3835.51,2425.47 3880,2425.47 v2(3900,2405.47)
  Bottom Layer w8: v2(2675.63,1789.65) 2725.63,1839.65 2725.63,2055.75 2739.13,2069.25 2739.13,2166.26 2725.74,2179.65 2724.53,2179.65 2690.63,2213.54 v2(2690.63,2254.65) ; v2(3355.63,2214.65) 3355.63,2219.65 3395.63,2259.65 3410.63,2259.65 ; v2(3900,2405.47) 3990,2405.47 4094,2301.47 4094.91,2301.47 4116,2280.38
TC_CS2: TP5.1 U3.112 U4_TC2.6 | length 2288.2
  Top Layer w8: U3.112@2399.88,1854.21 2456.06,1854.21 2500.63,1809.65 v2(2645.63,1809.65) ; v2(2670.63,2289.65) 2682.13,2278.15 2722.94,2278.15 2754.94,2246.15 2918.86,2246.15 2952.36,2279.65 3210.78,2279.65 3250.78,2239.65 3395.63,2239.65 v2(3410.63,2224.65) ; U4_TC2.6@3520.51,2425.47 v2(3585,2425.47)
  Bottom Layer w8: v2(2645.63,1809.65) 2650.63,1809.65 2710.63,1869.65 2710.63,2061.96 2724.13,2075.46 2724.13,2158.83 2667.13,2215.83 2667.13,2286.15 v2(2670.63,2289.65) ; v2(3585,2425.47) 3605,2405.47 3810,2405.47 ; 3810,2475.47 4025,2475.47 4100,2400.47 4100,2330.47
TCK/SWDCLK: JTAG/DEBUG.4 U3.28 | length 1144.9
  Top Layer w8: U3.28@1797.52,2555 1797.52,2607.64 1900.63,2710.75 1900.63,2711.01 2114.27,2924.65 2509.12,2924.65 2624.12,2809.65 JTAG/DEBUG.4@2710.71,2809.65
TDI: JTAG/DEBUG.8 U3.29 | length 1144.8
  Top Layer w8: U3.29@1777.83,2555 1777.83,2609.17 1885.63,2716.96 1885.63,2717.22 2108.06,2939.65 2516.84,2939.65 2556.84,2899.65 2700.71,2899.65 JTAG/DEBUG.8@2710.71,2909.65
TDO/SWO: JTAG/DEBUG.6 U3.30 | length 1201.9
  Top Layer w8: U3.30@1758.15,2555 1758.15,2610.69 1870.63,2723.17 1870.63,2723.43 2101.84,2954.65 2523.06,2954.65 2553.06,2924.65 v2(2590.63,2924.65) ; v2(2635.63,2859.65) JTAG/DEBUG.6@2710.71,2859.65
  Bottom Layer w8: v2(2590.63,2924.65) 2610.63,2904.65 2610.63,2884.65 v2(2635.63,2859.65)
THERM_AN1: C30_TR1.2 D3_TR1.1 D5_TR1.2 DA5.2 R14_TR1.1 TP52_TR1.1 U3.128 | length 1461.9
  Top Layer w8: U3.128@2399.88,2169.17 2400.88,2168.17 2455.37,2168.17 2486.84,2199.65 2584.42,2199.65 2662.13,2121.93 2662.13,2096.93 2699.42,2059.65 3075.63,2059.65 3190.63,2174.65 v2@3419.26,2174.65
  Top Layer w10: C30_TR1.2@4545,2418.03 D3_TR1.1@4669.02,2418.03 ; D3_TR1.1@4670,2417.05 R14_TR1.1@4670,2470.94
  Bottom Layer w10: v2(4090,2475.47) 4125,2440.47 4125,2359.1
  other v2: 3415.63,2176.02
THERM_AN2: C30_TR2.2 D3_TR2.1 D5_TR2.2 DA5.1 R14_TR2.1 TP52_TR2.1 U3.129 | length 1237.2
  Top Layer w8: U3.129@2399.88,2188.86 2454.84,2188.86 2480.63,2214.65 2590.63,2214.65 2677.13,2128.15 2677.13,2103.15 2705.63,2074.65 3068,2074.65 3193,2199.65 v2(3300.63,2199.65)
  Top Layer w10: C30_TR2.2@4210,2418.03 D3_TR2.1@4334.02,2418.03 ; R14_TR2.1@4335,2470.94 D3_TR2.1@4335,2417.05 4358.43,2417.05
TMS/SWDIO: JTAG/DEBUG.2 U3.31 | length 1334.9
  Top Layer w8: U3.31@1738.46,2555 1738.46,2612.48 2095.63,2969.65 2545.63,2969.65 v2(2560.63,2954.65) ; v2(2635.63,2759.65) JTAG/DEBUG.2@2710.71,2759.65
  Bottom Layer w8: v2(2560.63,2954.65) 2560.63,2834.65 v2(2635.63,2759.65)
TXD0: EXP2.4 U3.4 | length 1546
  Top Layer w8: 1185.63,1839.65 1369.56,1839.65 1409.56,1879.65 1430.31,1879.65 1485.31,1934.65 v2(1485.63,1934.65) ; v2(2265.63,2374.65) 2265.63,2404.65 2269.96,2408.98 U3.4@2269.96,2555
  Bottom Layer w8: v2(1485.63,1934.65) 1525.63,1974.65 1525.63,2080.86 1654.42,2209.65 2024.42,2209.65 2164.42,2349.65 2240.63,2349.65 v2(2265.63,2374.65)
TXD1: EXP0.4 U3.17 | length 2123.6
  Top Layer w8: U3.17@2014.06,2555 2014.06,2697.15 2131.9,2815 2307.04,2815 2320.9,2801.15 2484.13,2801.15 2515.63,2769.65 2515.63,2564.65 2680.63,2399.65 2718.86,2399.65 2754.13,2364.38 2754.13,2331.81 2779.79,2306.15 2894,2306.15 2927.5,2339.65 3235.63,2339.65 3275.63,2299.65 3439.04,2299.65 3529.04,2209.65
UD_N: R18.1 U6.6 | length 106.2
  Top Layer w10: R18.1@694.28,2649.65 U6.6@800.51,2649.65
UD_P: R20.1 U6.7 | length 106.2
  Top Layer w8: R20.1@694.28,2599.65 U6.7@800.51,2599.65
UI_N: R16.2 U6.11 | length 85.4
  Top Layer w8: U6.11@1160.75,2649.65 1210.63,2649.65 R16.2@1246.1,2649.65
UI_P: R15.2 U6.10 | length 85.4
  Top Layer w8: U6.10@1160.75,2599.65 1225.63,2599.65 R15.2@1246.1,2599.65
UMCU_N: R16.1 R22.1 U3.38 | length 621.8
  Top Layer w8: R16.1@1305.16,2649.65 1325.63,2649.65 1337.63,2637.65 1556.98,2637.65 1622.53,2572.1 1622.53,2477.45 1609.53,2464.45 U3.38@1569.17,2464.45 1489.8,2464.45 1479.53,2454.17 R22.1@1454.53,2454.17
UMCU_P: R5.1 R15.1 U3.37 | length 544.8
  Top Layer w8: R15.1@1305.16,2599.65 1325.63,2599.65 1345.63,2619.65 1549.53,2619.65 1604.53,2564.65 1604.53,2519.49 U3.37@1569.17,2484.13 1490.51,2484.13 1479.53,2495.12 R5.1@1454.53,2495.12
VBUS: C57.2 U3.39 U6.16 | length 870.5
  Top Layer w8: C57.2@1245.63,2902.2 1343.07,2902.2 1375.63,2869.65 1375.63,2712.71 v2@1423.69,2664.65 ; U3.39@1569.17,2444.76 v2@1639.53,2444.76
  Top Layer w20: U6.16@1160.75,2899.65 C57.2@1243.07,2899.65
  Bottom Layer w8: v2(1424.53,2664.65) 1424.53,2590.75 1490.63,2524.65 1559.53,2524.65 v2(1639.53,2444.65)
VDDANA: C13.2 C27.2 FB6.2 U3.73 | length 257.4
  Top Layer w10: 1530.63,1709.65 U3.73@1639.53,1709.65
  Top Layer w15: FB6.2@1394.53,1679.65 1500.63,1679.65 1530.63,1709.65
VDDBU: C28.2 C53.2 FB7.2 U3.52 | length 373.8
  Top Layer w10: FB7.2@1204.53,2211.02 1223.15,2211.02 1234.53,2199.65 1459.53,2199.65 1470.31,2188.86 U3.52@1569.17,2188.86
VDDIN: C54.2 C55.2 FB5.2 U3.57 | length 458
  Top Layer w8: FB5.2@1155.75,2086.02 FB5.2@1159.68,2082.09 ; FB5.2@1158.46,2072.09 1255.75,2072.09 1284.19,2043.65 1403.53,2043.65 1404.53,2044.65 ; C54.2@1255.75,2082.09 C54.2@1263.19,2074.65
  Top Layer w10: 1404.53,2044.65 1450.31,2090.43 U3.57@1569.17,2090.43
VDDOUT: C23.2 C36.2 C37.2 C38.2 C39.2 C41.2 C42.2 FB4.1 U3.10 U3.45 U3.56 U3.61 U3.104 U3.124 | length 4414.2
  Top Layer w10: v1(1300.63,1989.65) 1495.63,1989.65 1517.68,2011.69 U3.61@1569.17,2011.69 1616.57,2011.69 1674.53,2069.65 v1(1774.53,2069.65) ; v1(1354.53,2069.65) 1354.53,2107.09 1404.53,2107.09 1407.56,2110.12 U3.56@1569.17,2110.12 ; v1(1404.53,2389.65) 1404.53,2327.2 C41.2@1405.06,2326.67 ; C41.2@1405.08,2326.65 U3.45@1569.17,2326.65 ; FB4.1@1783.15,2844.65 v1(1783.15,2883.27) ; v1(2145,2720) 2146,2719 C38.2@2146,2685 2147,2684 2147,2628 2151.85,2623.15 U3.10@2151.85,2555 2151.85,2484.53 2155.63,2480.75 v1(2155.63,2444.65) ; C23.2@2240.63,1628.65 2240.63,1639.65 2250.28,1649.29 U3.104@2250.28,1724.29 2250.28,1759.46 2229.53,1780.2 2229.53,2024.65 v1(2295.31,2090.43) U3.124@2399.88,2090.43 2479.75,2090.43 2485.54,2084.65 C39.2@2524.53,2084.65
  Bottom Layer w10: v1(1300.63,1989.65) 1300.63,2015.75 v1(1354.53,2069.65) ; v1(1404.53,2389.65) 1394.53,2399.65 1394.53,2693.54 1468.13,2767.15 1692.03,2767.15 ; v1(1774.53,2069.65) 1795.31,2090.43 v1(2295.31,2090.43) 2295.31,2389.96 2240.63,2444.65 v1(2155.63,2444.65) ; v1(1783.15,2883.27) 1753.15,2883.27 1699.53,2829.65 1699.53,2774.65 1692.03,2767.15 ; v1@2146,2719 1925.17,2719 1877.03,2767.15 1692.03,2767.15
VDDPLL: C32.2 C33.2 FB4.2 U3.34 | length 326.1
  Top Layer w10: U3.34@1679.41,2555 1679.41,2612.18 1668.63,2622.96 1668.63,2665.99 1740.91,2738.26 1740.91,2839.65 FB4.2@1735.91,2844.65
VDDUTMI: C60.2 C61.2 FB8.2 U3.41 | length 390
  Top Layer w10: FB8.2@1204.53,2321.02 C60.2@1300.59,2321.02 ; C60.2@1312.09,2324.65 1327.09,2339.65 v1(1355.63,2339.65) ; v1(1499.53,2394.65) 1519.53,2394.65 1530.28,2405.39 U3.41@1569.17,2405.39
  Bottom Layer w10: v1@1359.53,2334.65 1359.53,2343.54 1375.63,2359.65 1464.53,2359.65 v1(1499.53,2394.65)
XOUT32: U3.49
pads on no net: FD1.1 FD2.1 FD3.1 JTAG/DEBUG.7 S1.3 S1.4 U3.32 U3.48 U3.127 U3.136 U3.137 U3.138 U4_TC1.8 U4_TC2.8 U7_M1.18 U7_M1.19 U7_M1.23 U7_M1.27 U7_M2.18 U7_M2.19 U7_M2.23 U7_M2.27 U7_M3.18 U7_M3.19 U7_M3.23 U7_M3.27 U7_M4.18 U7_M4.19 U7_M4.23 U7_M4.27 U7_M5.18 U7_M5.19 U7_M5.23 U7_M5.27

## Polygon pours and split planes (outlines as drawn)
GND on Top Layer "Mechanical 15-No Net" (solid, remove dead copper, pour order 76): 4730,3335 4660,3335 3920,3335 3920,3515 4730,3515
GND on Top Layer "Mechanical 15-No Net" (solid, remove dead copper, pour order 74): 4730,2850 3875,2850 3875,3080 3865,3090 4215,3090 4730,3090
NetF2_1 on Top Layer "Mechanical 15-No Net" (solid, remove dead copper, pour order 72): 4730,3525 4200,3525 3800,3525 3800,3975 4500,3975 4500,3740 4730,3740
NetF1_1 on Top Layer "Mechanical 15-No Net" (solid, remove dead copper, pour order 70): 4730,3325 4000,3325 4000,3105 4005,3100 4730,3100
NetD18_C on Top Layer "Mechanical 15-No Net" (solid, remove dead copper, pour order 68): 2390,3215 2600,3215 2950,3215 2950,3975 2435,3975 2435,3490 2435,3415 2435,3405 2390,3405
GND on Top Layer "Mechanical 15-No Net" (solid, remove dead copper, pour order 55): 172.48,1065 172.48,850 302.48,850 322.48,830 327.48,825 467.48,825 682.48,825 682.48,750 722.48,750 722.48,850 862.48,850 862.48,1065 727.48,1065 727.48,960 352.48,960 352.48,1065
GND on Top Layer "Mechanical 15-No Net" (solid, remove dead copper, pour order 55): 897.48,1065 897.48,850 1027.48,850 1047.48,830 1052.48,825 1192.48,825 1407.48,825 1407.48,750 1447.48,750 1447.48,850 1587.48,850 1587.48,1065 1452.48,1065 1452.48,960 1077.48,960 1077.48,1065
GND on Top Layer "Mechanical 15-No Net" (solid, remove dead copper, pour order 55): 1622.48,1065 1622.48,850 1752.48,850 1772.48,830 1777.48,825 1917.48,825 2132.48,825 2132.48,750 2172.48,750 2172.48,850 2312.48,850 2312.48,1065 2177.48,1065 2177.48,960 1802.48,960 1802.48,1065
GND on Top Layer "Mechanical 15-No Net" (solid, remove dead copper, pour order 55): 2347.48,1065 2347.48,850 2477.48,850 2497.48,830 2502.48,825 2642.48,825 2857.48,825 2857.48,750 2897.48,750 2897.48,850 3037.48,850 3037.48,1065 2902.48,1065 2902.48,960 2527.48,960 2527.48,1065
GND on Top Layer "Mechanical 15-No Net" (solid, remove dead copper, pour order 57): 2248.5,3118.19 2248.5,3018.19 2253.5,3013.19 2563.5,3013.19 2563.5,3078.19 2523.5,3078.19 2523.5,3203.19 2383.5,3203.19 2383.5,3118.19
GND on Top Layer "Mechanical 15-No Net" (solid, remove dead copper, pour order 57): 1843.5,3118.19 1843.5,3018.19 1848.5,3013.19 2158.5,3013.19 2158.5,3078.19 2118.5,3078.19 2118.5,3203.19 1978.5,3203.19 1978.5,3118.19
GND on Top Layer "Mechanical 15-No Net" (solid, remove dead copper, pour order 57): 1442.5,3118.61 1442.5,3018.61 1447.5,3013.61 1757.5,3013.61 1757.5,3078.61 1717.5,3078.61 1717.5,3203.61 1577.5,3203.61 1577.5,3118.61
GND on Top Layer "Mechanical 15-No Net" (solid, remove dead copper, pour order 57): 1044,3119 1044,3019 1049,3014 1359,3014 1359,3079 1319,3079 1319,3204 1179,3204 1179,3119
GND on Top Layer "Mechanical 15-No Net" (solid, remove dead copper, pour order 55): 3072.48,1065 3072.48,850 3202.48,850 3222.48,830 3227.48,825 3367.48,825 3582.48,825 3582.48,750 3622.48,750 3622.48,850 3762.48,850 3762.48,1065 3627.48,1065 3627.48,960 3252.48,960 3252.48,1065
NetD12_1 on Top Layer "Mechanical 15-No Net" (solid, remove dead copper, pour order 42): 1184.5,3214.81 1374.5,3214.81 1374.5,3224.81 1429.5,3224.81 1444.5,3224.81 1444.5,3974.81 1239.5,3974.81 1239.5,3414.81 1184.5,3414.81
NetD14_C on Top Layer "Mechanical 15-No Net" (solid, remove dead copper, pour order 42): 1583,3214.42 1773,3214.42 1773,3224.42 1828,3224.42 1843,3224.42 1843,3974.42 1638,3974.42 1638,3414.42 1583,3414.42
NetD16_C on Top Layer "Mechanical 15-No Net" (solid, remove dead copper, pour order 42): 1984,3214 2174,3214 2174,3224 2229,3224 2244,3224 2244,3974 2039,3974 2039,3414 1984,3414
GND on Top Layer "SMPS" (solid, pour order 55): 4197,1161 4225,1133 4225,1045 4275,995 4398,995 4398,1120 4349,1169 4347,1171 4214,1171 4197,1171
NetC40_2 on Top Layer "SMPS" (solid, pour order 53): 4131,1175 4153.77,1197.77 4153.77,1242 4260,1348.23 4260,1364 4276,1380 4352,1380 4390,1418 4390,1504 4372,1522 4290,1522 4177,1522 4131,1476 4120,1465 4120,1193 4120,1178 4123,1175
NetD2_A on Top Layer "SMPS" (solid, pour order 51): 4164,1178 4300,1178 4349,1178 4398,1227 4398,1340 4374,1364 4285,1364 4273,1352 4273,1335 4192,1254 4165,1227 4165,1181
GND on Groun Plane (split plane): 975.53,2364.74 20.1,2364.74 20.1,3004.55 975.53,3004.55
GND on Groun Plane (split plane): 4734.9,20.1 20.1,20.1 20.1,2354.55 980.63,2354.55 982.58,2354.94 984.23,2356.04 985.34,2357.69 985.73,2359.65 985.73,3009.65 985.34,3011.6 984.23,3013.25 982.58,3014.36 980.63,3014.74 20.1,3014.74 20.1,3979.9 4734.9,3979.9
NetF2_1 on Power Plane (split plane): 4734.9,3650.1 4530.1,3650.1 4530.1,3979.9 4734.9,3979.9
NetF1_1 on Power Plane (split plane): 4734.9,3395.1 4530.1,3395.1 4530.1,3639.9 4734.9,3639.9
+12VCC2 on Power Plane (split plane): 4519.9,3900.1 3370.1,3900.1 3370.1,3979.9 4519.9,3979.9
+12VCC2 on Power Plane (split plane): 3359.9,3895 3360.29,3893.05 3361.4,3891.4 3363.05,3890.29 3365,3889.9 4519.9,3889.9 4519.9,3645 4519.9,3390 4520.29,3388.05 4521.4,3386.4 4523.05,3385.29 4525,3384.9 4734.9,3384.9 4734.9,20.1 20.1,20.1 20.1,3979.9 3359.9,3979.9

## Keep-outs
Keep-Out Layer:
  lines w10: 25,25 4730,25 4730,3975 25,3975 25,25

## Other copper
Top Layer:
  text "AVR" at 1870,5000 h160 r180
Bottom Layer:
  text "Tigershark 3D V1" at 130,1115 h130 r90
Groun Plane (plane layer: these items are gaps in the copper):
  lines w10: 5.63,2359.65 110.63,2359.65 980.63,2359.65 980.63,3009.65 80.63,3009.65 5.63,3009.65
Power Plane (plane layer: these items are gaps in the copper):
  lines w10: 0,0 1,895 ; 3070.63,3169.65 3385.63,3169.65 ; 3365,4115 3365,3895 3665,3895 ; 3645,3895 4525,3895 ; 4525,4610 4525,3645 ; 4535.63,3169.65 4535.63,3274.65 ; 5510,3390 5140,3390 4525,3390 4525,3645 ; 5510,3645 4525,3645

## Silkscreen, mask and mechanical layers (free items; w line width, h text height)
Top Overlay:
  lines w6: 4630,350 4735,350 ; 4630,800 4735,800 ; 4635,2890 4740,2890 ; 4635,3315 4740,3315 ; 4635,3740 4740,3740
  lines w10: 185,40 220,40 220,220 40,220 40,40 195,40 ; 435,4950 435,5200 ; 2555.63,2999.65 3055.63,2999.65 ; 2774,3474 2774,3959 ; 8280,4910 8485,4910 ; 8285,5180 8485,5180 ; 45,3690 200,3690 225,3690 225,3870 45,3870 45,3690 ; 4530,45 4530,225 4710,225 4710,45 4530,45 ; 4530,3760 4530,3940 4710,3940 4710,3760 4530,3760
  lines w15: 4650,695 4680,695 4720,695 ; 4650,3215 4680,3215 4720,3215 ; 4650,3615 4680,3615 4720,3615 ; 4685,455 4685,525 ; 4685,660 4685,730 ; 4685,2975 4685,3045 ; 4685,3180 4685,3250 ; 4685,3375 4685,3445 ; 4685,3580 4685,3650
  lines w20: 1625,4860 1625,5035 1900,5035 1900,4860 1625,4860
  text "K-Smart Port" at 7010,5595 h155
  text "HEATBED" at 6446,5443 h100 r90
  text "12V - 24V" at 6516,5438 h100 r90
  text "ENDSTOPS" at 8260,5365 h155
  text "MAX" at 8280,5190 h120
  text "MOSFETs" at 6436,5043 h100 r90
  text "12V - 24V" at 6516,5043 h100 r90
  text "b" at 4155,4990 h270
  text "S" at 5495,4990 h100
  text "FANs" at 420,4945 h130 r90
  text "S" at 4815,4930 h1200
  text "MIN" at 8280,4920 h120
  text "HEATBED 15A" at 4070,4680 h120
  text "HEAT-0" at 1094,3544 h100
  text "HEAT-1" at 1454,3544 h100
  text "HEAT-2" at 1849,3544 h100
  text "HEATBED" at 2249,3544 h100
  text "FAN-1" at 269,3534 h120
  text "FAN-0" at 614,3534 h120
  text "HEATERs" at 2754,3479 h130 r90
  text "TC-0" at 3485,2835 h80
  text "TC-1" at 3800,2835 h80
  text "THM-0" at 4105,2835 h80
  text "THM-1" at 4425,2835 h80
  text "Tigershark" at 2485.63,2409.65 h220
  text "Prototype Rev 2V0" at 2895.63,2349.65 h80
  text "Designed By" at 2684.2,2289.65 h90
  text "Adam Vadala-Roth" at 2570.63,2209.65 h90
  text "ERASE" at 2470.63,1734.65 h75
  text "Smart Port" at 7030,1095 h155
  text "GPIO Port" at 7320,700 h155
  text "STEPPER DRIVERS" at 130,360 h130 r90
  text "MTR PWR" at 4185,100 h90
  text "X" at 780,35 h150
  text "Y" at 1510,35 h150
  text "Z" at 2235,35 h150
  text "E0" at 2960,35 h150
  text "E1" at 3685,35 h150
  text "12V - 24V" at 4185,35 h90
Bottom Overlay:
  drawing of 2 lines, arcs and shapes, not listed
  text "G" at 11640.52,4072.26 h310
  text "Tigershark 3D" at 4220,1395 h250
  text "Powered by TinyG2CORE" at 4530,1240 h140
  text "Based On the Work of Ultimachine," at 4530,945 h135
  text "Arduino, RepRap, and Synthetos.com" at 4535,855 h135
  text "Developed by Adam Vadala-Roth in" at 4530,750 h135
  text "collaboration with Johnny Russel" at 4525,650 h135
  text "and Alden Hart" at 4520,555 h135
  text "#YOLO" at 3485,400 h200
  text "S" at 3645,285 h2000
  text "S" at 4535,255 h175
  text "Released as Open Source Hardware Under the CERN Open Hardware Liscense" at 4525,50 h125
Top Solder:
  text "AVR" at 1870,5000 h160 r180
Mechanical 15:
  the board outline again, w10

## Text inside footprints (layer, text, board x,y; h text height)
C7: Top Overlay "+" at 4120.27,489.82 h77.5 r225; Top Overlay "+" at 4181.52,551.06 h77.5 r225
FAN-1: Mechanical 16 "1" at 306.5,3766.5 h62
"Heat Power": Top Overlay "4" at 4370,3115 h77.5 r270; Top Overlay "3" at 4370,3315 h77.5 r270; Top Overlay "2" at 4370,3515 h77.5 r270; Top Overlay "1" at 4370,3700 h77.5 r270
MAX1_ES1: Mechanical 16 "1" at 3522.5,1812.5 h62
MAX1_ES2: Mechanical 16 "1" at 4352.5,1812.5 h62
MAX1_ES3: Mechanical 16 "1" at 3937.5,1812.5 h62
MIN1_ES1: Mechanical 16 "1" at 3847.5,2177.5 h62 r180
MIN1_ES2: Mechanical 16 "1" at 4677.5,2177.5 h62 r180
MIN1_ES3: Mechanical 16 "1" at 4262.5,2177.5 h62 r180
"Motor Power": Top Overlay "2" at 4365,575 h77.5 r270; Top Overlay "1" at 4365,760 h77.5 r270
P2_TR1: Mechanical 16 "1" at 4677.5,2737.97 h62 r180
P2_TR2: Mechanical 16 "1" at 4362.5,2737.97 h62 r180
T1: Top Overlay "1" at 649,3679 h77.5; Top Overlay "2" at 834,3679 h77.5; Top Overlay "3" at 1034,3679 h77.5; Top Overlay "4" at 1234,3679 h77.5
T2_TC1: Mechanical 16 "1" at 4047.5,2737.97 h62 r180
T2_TC2: Mechanical 16 "1" at 3732.5,2737.97 h62 r180
U3: Top Overlay "TQFP 144" at 1877.58,2237 h49.6 r270; Top Overlay "R" at 1933.09,1992.37 h37.2 r270